# Altium PCB LED1710051012.PcbDoc
Units mm, origin at the board's own origin, x right, y up, seen from the top; angles counter-clockwise.
Board outline 152.4 x 101.6 mm, 2 copper layers (Top Layer, Bottom Layer); 15 components, 15 nets, 61 pads, 37 vias.
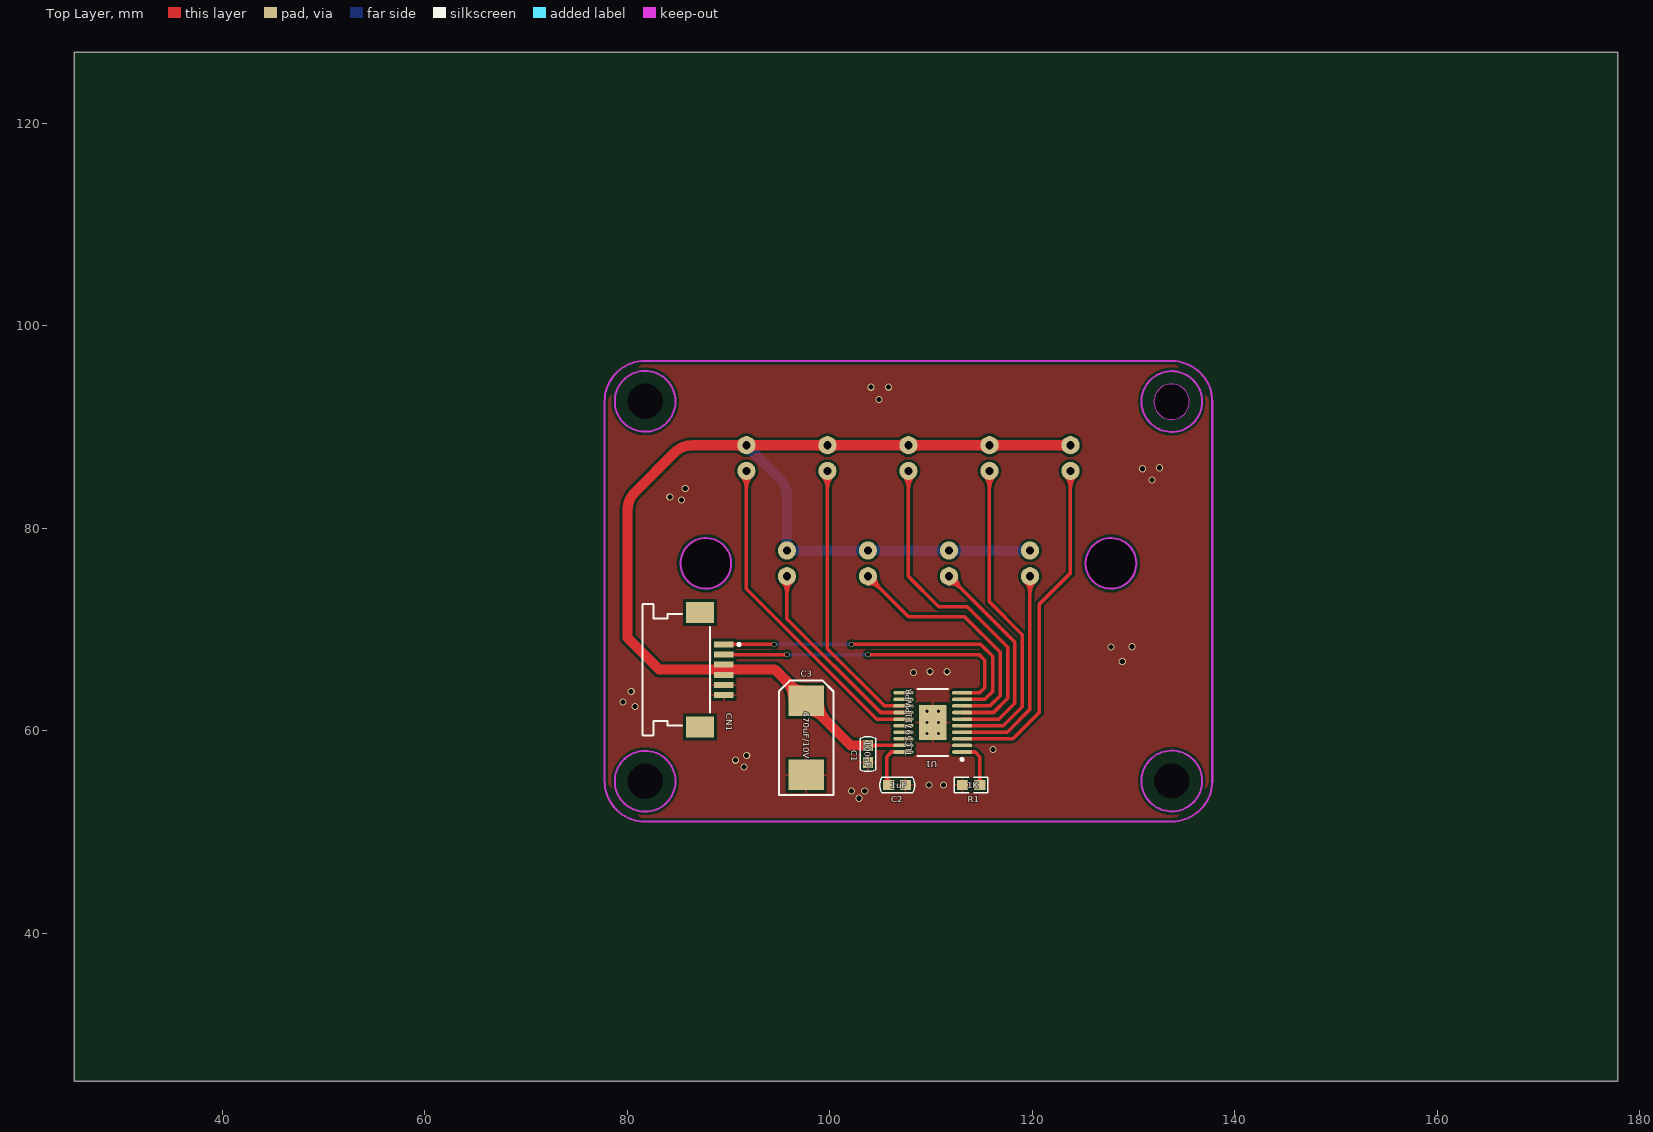
[diagram p0: Top Layer view]
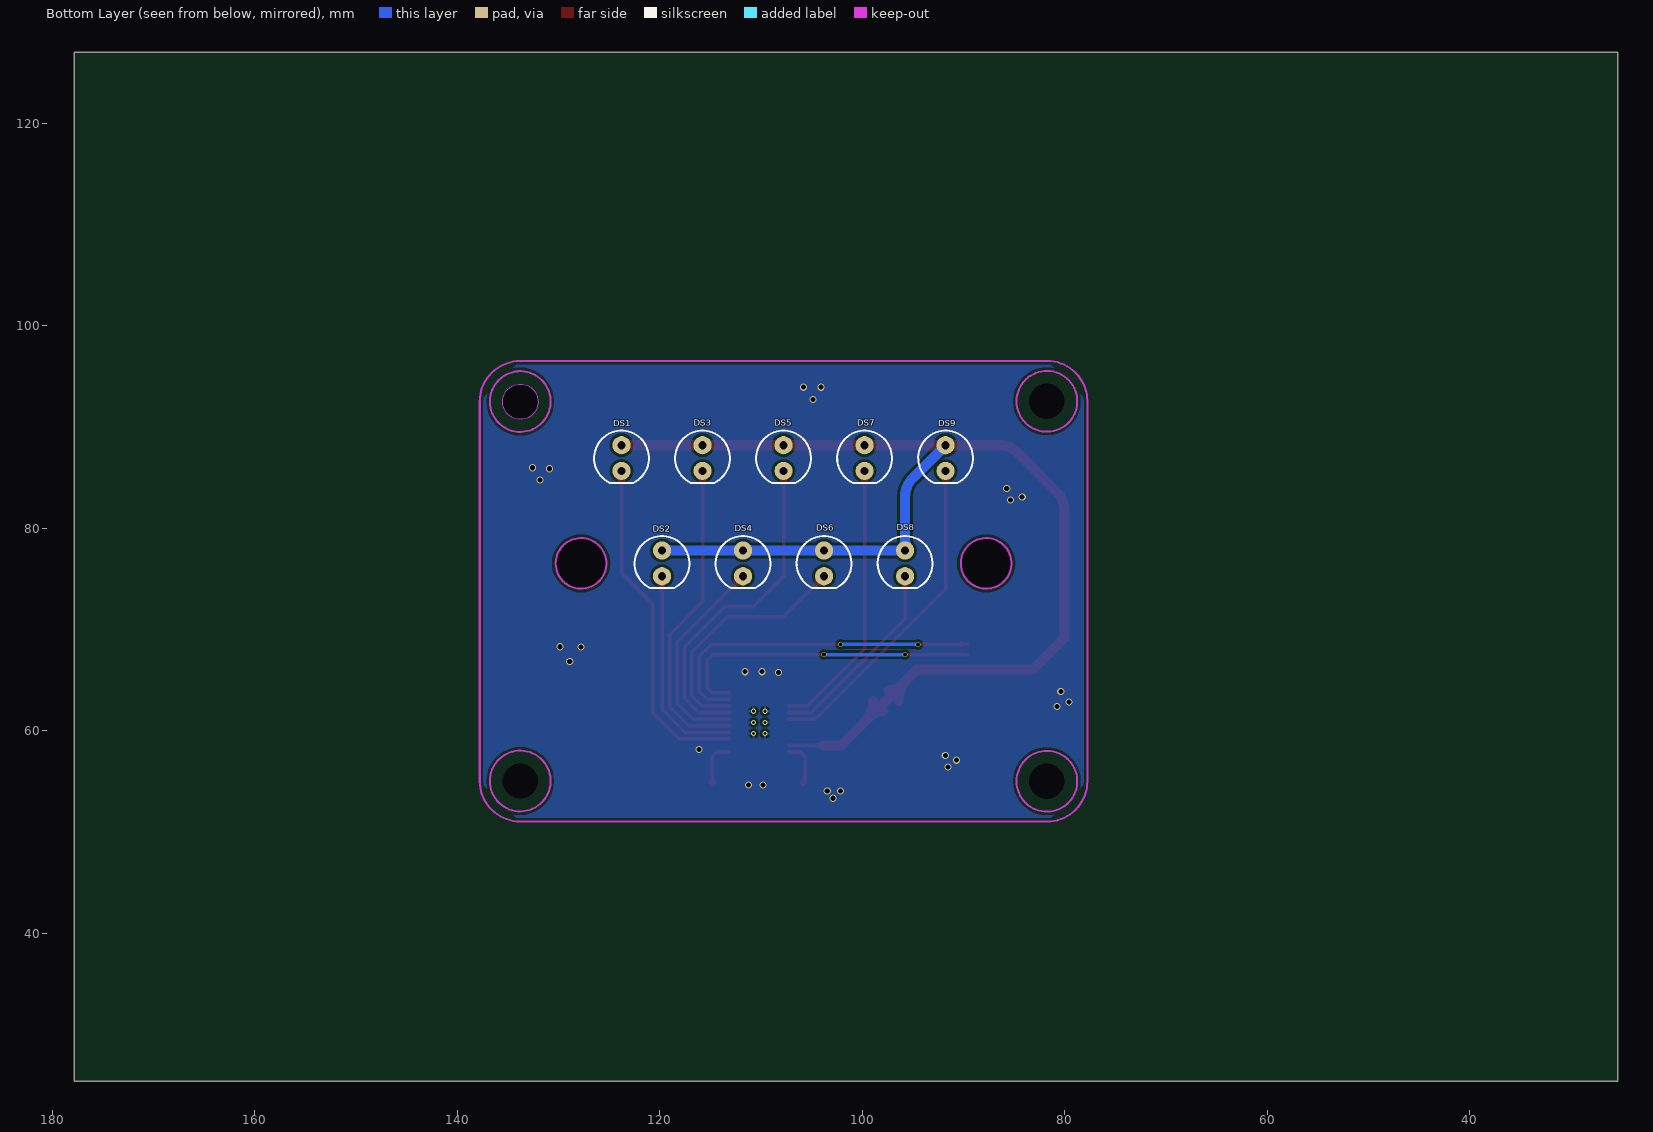
[diagram p1: Bottom Layer view, seen from below]

## Layer stack, top to bottom
Top Solder: solder mask 0.0102, Solder Resist, Dk 3.5
Top Layer: signal copper 0.0356
Dielectric1: dielectric 0.32, FR-4, Dk 4.8
Bottom Layer: signal copper 0.0356
Bottom Solder: solder mask 0.0102, Solder Resist, Dk 3.5

## Board outline
25.4,25.4 177.8,25.4 177.8,127 25.4,127

## Design rules (kind name [scope] priority, off if disabled: settings)
Clearance [All] p1: gap=0.254 ignorepadtopadclearanceinfootprint=FALSE except(0: Arc-Hole Track-Hole SMDPad-Hole THPad-Hole Via-Hole Fill-Hole Poly-Hole Region-Hole Text-Hole)
PolygonConnect [All] p1: connectstyle=Relief reliefconductorwidth=0.254 reliefentries=4 polygonreliefangle="90 Angle" airgapwidth=0.254
RoomDefinition LED1705180858 [InComponentClass('LED1705180858')] p1: confinementstyle=ConfineIn formatcopy=TRUE lockcomponents=FALSE outline 0,0 50.8,0 50.8,25.4 0,25.4
RoutingVias [All] p1: holewidth=0.711 width=1.27 viastyle="Through Hole" minholewidth=0.711 minwidth=1.27 maxholewidth=0.711 maxwidth=1.27
SilkToSolderMaskClearance SilkscreenOverComponentPads [IsPad] p1: minsilkscreentomaskgap=0.254 clearancetoexposedcopper=TRUE
SolderMaskExpansion [All] p1: expansion=0.102
Width [All] p1: maxlimit=1 minlimit=0.254 preferedwidth=0.254 minimp=50.000000 maximp=50.000000 favimp=50.000000
29 further rules are at their usual default settings.

## Components (designator, comment, footprint, x,y, rotation, side; value= is the part's Value field where it differs from the comment)
C1 "100nF" C0603-3 103.759,57.709 r270 top
C2 "1uF" C0603-3 106.655,54.635 r0 top
C3 "470uF/10V" CASE-D_7343 97.663,59.309 r90 top
CN1 "" FFC/SM1.0-2H6 88.365,66.033 r270 top
DS1 "" LED2-2.54-5C 123.765,86.933 r180 bottom
DS2 "" LED2-2.54-5C 119.765,76.533 r180 bottom
DS3 "" LED2-2.54-5C 115.765,86.933 r180 bottom
DS4 "" LED2-2.54-5C 111.765,76.533 r180 bottom
DS5 "" LED2-2.54-5C 107.765,86.933 r180 bottom
DS6 "" LED2-2.54-5C 103.765,76.533 r180 bottom
DS7 "" LED2-2.54-5C 99.765,86.933 r180 bottom
DS8 "" LED2-2.54-5C 95.765,76.533 r180 bottom
DS9 "" LED2-2.54-5C 91.765,86.933 r180 bottom
R1 "1K" R0603-3 113.919,54.635 r180 top
U1 "TLC59711PWPR" HTSSOP20 110.165,60.833 r90 top

## Footprints (in the part's own frame and the unit in brackets; to place one, negate y for a bottom-side part, rotate by r counter-clockwise, add the part's x,y. Pads: shape width x height; smd on the part's side, far side on the other; paste and mask are expansions set on the pad)
C0603-3 [mm]
  rect 1.1x1 smd: 1(-0.838,0) 2(0.838,0)
  silkscreen extent -1.71,-0.76 1.72,0.76
CASE-D_7343 [mm]
  rect 3x3.5 smd: 1(3.65,0) 2(-3.65,0)
  silkscreen extent -5.65,-2.7 5.65,2.7
FFC/SM1.0-2H6 [mm] "FPC Connector, 6-Leads, Right Angle, Pitch 1.0 mm, Mated Height 3.0 mm, SMT"
  rect 0.6x1.9 smd: 1(-2.5,1.175) 2(-1.5,1.175) 3(-0.5,1.175) 4(0.5,1.175) 5(1.5,1.175) 6(2.5,1.175)
  rect 2.1x2.8 smd: MP1(-5.65,-1.175) MP2(5.65,-1.175)
  silkscreen extent -6.5,-6.87 6.5,2.8, body extent -6.5,-6.87 6.5,1.83, height 3.01
HTSSOP20 [mm] "SOP, 20-Leads, Body 6.5x4.4mm, Pitch 0.65mm, Thermal Pad 2.965x2.29mm, IPC Low Density"
  oval 0.35x2 smd: 1(-2.925,-2.9) 2(-2.275,-2.9) 3(-1.625,-2.9) 4(-0.975,-2.9) 5(-0.325,-2.9) 6(0.325,-2.9) 7(0.975,-2.9) 8(1.625,-2.9) 9(2.275,-2.9) 10(2.925,-2.9) 11(2.925,2.9) 12(2.275,2.9) 13(1.625,2.9) 14(0.975,2.9) 15(0.325,2.9) 16(-0.325,2.9) 17(-0.975,2.9) 18(-1.625,2.9) 19(-2.275,2.9) 20(-2.925,2.9)
  rect 3.43x2.75 smd: 21(0,0)
  silkscreen extent -3.77,-3.03 3.3,1.5, body extent -3.3,-2.25 3.3,2.25, height 1.2
LED2-2.54-5C [mm]
  round 1.8 hole 0.8: 1(0,1.27) 2(0,-1.27)
  silkscreen extent -2.7,-2.44 2.7,2.7
R0603-3 [mm]
  rect 1.1x1 smd: 1(-0.889,0) 2(0.811,0)
  silkscreen extent -1.69,-0.76 1.61,0.76, body extent -1.18,-0.38 1.1,0.38, height 1

## Part data
C1 C2: library part Cap, "Capacitor"
C3: library part "Cap Pol1", "Polarized Capacitor (Radial)"
CN1: library part "Header 6", "Header, 6-Pin"
DS1 DS2 DS3 DS4 DS5 DS6 DS7 DS8 DS9: library part LED0, "Typical INFRARED GaAs LED"
R1: library part Res3, "Resistor"
U1: library part TLC59711, "12-Channel,16-Bit,LED Driver with 3.3-V Linear Ragulator"

## Free pads (board coordinates)
  round 1.524 hole 3.5: 0(81.765,55.021) 0(81.765,92.533) 0(133.765,55.045) 0(133.765,92.513)
  round 0 hole 5: 0(87.765,76.533) 0(127.765,76.533)

## Via types
v1: diameter 0.7, hole 0.5, Top Layer to Bottom Layer, 27 vias
v2: diameter 0.5, hole 0.3, Top Layer to Bottom Layer, 6 vias
v3: diameter 0.5, hole 0.38, Top Layer to Bottom Layer, 4 vias

## Nets (pads, with @x,y where several pads share a name; then routed paths per layer and width w, separated by ;. In a path a pad name is that pad's centre, name@x,y a point inside that pad or via, vN(x,y) a via of type N, cw(c..) or ccw(c..) an arc to the next point about the centre after c; other vN are vias at no path point)
+5V: C1.1 C3.1 CN1.3 CN1.4 DS1.1 DS2.1 DS3.1 DS4.1 DS5.1 DS6.1 DS7.1 DS8.1 DS9.1 U1.19 | length 161.6
  Top Layer w0.35: C1.1 103.77,58.558 U1.19 ; C1.1@103.989,58.317 cw(c104.57,57.736) 104.57,58.558 ; C1.1@103.989,58.777 ccw(c104.517,59.305) 104.517,58.558
  Top Layer w1: DS9.1@91.482,87.92 ccw(c90.799,87.237) 90.799,88.203 ccw(c90.799,89.169) DS9.1@91.482,88.486 ; DS9.1@92.048,87.92 cw(c92.731,87.237) 92.731,88.203 cw(c92.731,89.169) DS9.1@92.048,88.486 ; 95.529,65.093 cw(c93.395,62.959) C3.1@96.413,62.959 ; 96.133,64.489 ccw(c97.413,65.77) C3.1@97.413,63.959 ; C3.1@97.913,61.959 cw(c97.913,60.148) 99.193,61.429 ; C3.1@98.913,62.959 ccw(c101.931,62.959) 99.797,60.825 ; DS7.1@99.482,87.92 ccw(c98.799,87.237) 98.799,88.203 ccw(c98.799,89.169) DS7.1@99.482,88.486 ; DS7.1@100.048,87.92 cw(c100.731,87.237) 100.731,88.203 cw(c100.731,89.169) DS7.1@100.048,88.486 ; C1.1@103.77,58.558 102.064,58.558 C3.1 94.557,66.065 83.134,66.065 80.035,69.164 80.035,81.792 cw(c82.575,81.792) 80.779,83.588 84.65,87.459 cw(c86.446,85.663) 86.446,88.203 DS9.1 DS7.1 DS5.1 DS3.1 DS1.1 ; DS5.1@107.482,87.92 ccw(c106.799,87.237) 106.799,88.203 ccw(c106.799,89.169) DS5.1@107.482,88.486 ; DS5.1@108.048,87.92 cw(c108.731,87.237) 108.731,88.203 cw(c108.731,89.169) DS5.1@108.048,88.486 ; DS3.1@115.482,87.92 ccw(c114.799,87.237) 114.799,88.203 ccw(c114.799,89.169) DS3.1@115.482,88.486 ; DS3.1@116.048,87.92 cw(c116.731,87.237) 116.731,88.203 cw(c116.731,89.169) DS3.1@116.048,88.486 ; DS1.1@123.482,87.92 ccw(c122.799,87.237) 122.799,88.203 ccw(c122.799,89.169) DS1.1@123.482,88.486
  Bottom Layer w1: DS9.1@91.765,87.803 cw(c91.765,86.837) 92.448,87.52 cw(c93.131,88.203) DS9.1@92.165,88.203 ; DS9.1 95.021,84.947 cw(c93.225,83.151) 95.765,83.151 DS8.1 DS6.1 DS4.1 DS2.1 ; DS8.1@95.482,78.086 ccw(c94.799,78.769) 95.765,78.769 ccw(c96.731,78.769) 96.048,78.086 ccw(c96.731,78.769) 96.731,77.803 ccw(c96.731,76.837) DS8.1@96.048,77.52 ; DS6.1@103.482,77.52 ccw(c102.799,76.837) 102.799,77.803 ccw(c102.799,78.769) DS6.1@103.482,78.086 ; DS6.1@104.048,77.52 cw(c104.731,76.837) 104.731,77.803 cw(c104.731,78.769) DS6.1@104.048,78.086 ; DS4.1@111.482,77.52 ccw(c110.799,76.837) 110.799,77.803 ccw(c110.799,78.769) DS4.1@111.482,78.086 ; DS4.1@112.048,77.52 cw(c112.731,76.837) 112.731,77.803 cw(c112.731,78.769) DS4.1@112.048,78.086 ; DS2.1@119.482,77.52 ccw(c118.799,76.837) 118.799,77.803 ccw(c118.799,78.769) DS2.1@119.482,78.086
GND: C1.2 C2.2 C3.2 CN1.5 CN1.6 R1.2 U1.2 U1.21
  other v1: 102.895,53.34 102.159,54.051 103.454,54.077 109.804,54.635 111.227,54.661 91.542,56.413 90.678,57.099 91.796,57.582 116.103,58.141 80.747,62.408 79.578,62.84 80.391,63.881 108.28,65.761 109.906,65.837 111.557,65.837 128.88,66.853 127.762,68.275 129.845,68.301 85.369,82.779 84.201,83.109 85.725,83.947 131.826,84.785 130.886,85.877 132.563,85.979 104.877,92.71 104.064,93.929 105.791,93.929
  other v2: 109.615,59.733 110.715,59.733 109.615,60.833 110.715,60.833 109.615,61.933 110.715,61.933
NetC2_1: C2.1 U1.20 | length 6.5
  Top Layer w0.35: 105.613,55.79 ccw(c106.921,55.79) C2.1@105.996,54.865 ; 105.846,57.662 cw(c106.44,57.067) U1.20@106.44,57.908 ; C2.1@105.918,54.635 105.613,54.94 105.613,57.429 106.092,57.908 U1.20
NetCN1_1: CN1.1 U1.9 | length 34.3
  Top Layer w0.35: CN1.1 94.484,68.533 v3(94.488,68.529) ; CN1.1@90.278,68.445 cw(c90.492,68.231) 90.492,68.533 cw(c90.492,68.835) CN1.1@90.278,68.621 ; v3(102.133,68.529) 114.91,68.529 116.078,67.361 116.078,63.881 115.305,63.108 U1.9
  Bottom Layer w0.35: v3(94.488,68.529) v3(102.133,68.529)
NetCN1_2: CN1.2 U1.10 | length 31.6
  Top Layer w0.35: CN1.2 v3(95.778,67.533) ; CN1.2@90.278,67.445 cw(c90.492,67.231) 90.492,67.533 cw(c90.492,67.835) CN1.2@90.278,67.621 ; v3(103.779,67.533) 114.737,67.533 115.291,66.98 115.291,64.262 114.787,63.758 U1.10
  Bottom Layer w0.35: v3(95.778,67.533) v3(103.779,67.533)
NetDS1_2: DS1.2 U1.3 | length 38
  Top Layer w0.35: U1.3 118.085,59.208 120.701,61.824 120.701,72.517 123.765,75.581 DS1.2 ; DS1.2@123.252,85.15 cw(c122.015,83.913) 123.765,83.913 cw(c125.515,83.913) DS1.2@124.278,85.15 ; DS1.2@123.5,85.398 cw(c122.86,84.758) 123.765,84.758 cw(c124.67,84.758) DS1.2@124.03,85.398
NetDS2_2: DS2.2 U1.4 | length 24.3
  Top Layer w0.35: U1.4 117.516,59.858 119.761,62.103 119.761,75.259 DS2.2 ; DS2.2@119.252,74.75 cw(c118.024,73.522) 119.761,73.522 ; 119.761,73.503 cw(c121.525,73.503) DS2.2@120.278,74.75 ; 119.761,74.348 cw(c120.68,74.348) DS2.2@120.03,74.998
NetDS3_2: DS3.2 U1.5 | length 35.5
  Top Layer w0.35: U1.5 117.125,60.508 118.999,62.382 118.999,69.494 115.765,72.728 DS3.2 ; DS3.2@115.252,85.15 cw(c114.015,83.913) 115.765,83.913 cw(c117.515,83.913) DS3.2@116.278,85.15 ; DS3.2@115.5,85.398 cw(c114.86,84.758) 115.765,84.758 cw(c116.67,84.758) DS3.2@116.03,85.398
NetDS4_2: DS4.2 U1.6 | length 25.2
  Top Layer w0.35: DS4.2@111.765,74.538 cw(c111.765,72.788) 113.003,74.025 cw(c114.24,75.263) DS4.2@112.49,75.263 ; DS4.2@111.765,74.888 cw(c111.765,73.983) 112.405,74.623 cw(c113.045,75.263) DS4.2@112.14,75.263 ; DS4.2 118.262,68.766 118.262,62.738 116.682,61.158 U1.6
NetDS5_2: DS5.2 U1.7 | length 37.4
  Top Layer w0.35: DS5.2@107.252,85.15 cw(c106.015,83.913) 107.765,83.913 cw(c109.515,83.913) DS5.2@108.278,85.15 ; DS5.2@107.5,85.398 cw(c106.86,84.758) 107.765,84.758 cw(c108.67,84.758) DS5.2@108.03,85.398 ; DS5.2 107.765,75.242 110.744,72.263 113.563,72.263 117.577,68.25 117.577,63.221 116.164,61.808 U1.7
NetDS6_2: DS6.2 U1.8 | length 28.8
  Top Layer w0.35: DS6.2@103.765,74.538 cw(c103.765,72.788) 105.003,74.025 cw(c106.24,75.263) DS6.2@104.49,75.263 ; DS6.2@103.765,74.888 cw(c103.765,73.983) 104.405,74.623 cw(c105.045,75.263) DS6.2@104.14,75.263 ; DS6.2 107.781,71.247 113.335,71.247 116.815,67.767 116.815,63.475 115.798,62.458 U1.8
NetDS7_2: DS7.2 U1.13 | length 31.6
  Top Layer w0.35: DS7.2@99.252,85.15 cw(c98.015,83.913) 99.765,83.913 cw(c101.515,83.913) DS7.2@100.278,85.15 ; DS7.2@99.5,85.398 cw(c98.86,84.758) 99.765,84.758 cw(c100.67,84.758) DS7.2@100.03,85.398 ; DS7.2 99.765,68.104 105.411,62.458 U1.13
NetDS8_2: DS8.2 U1.14 | length 23.7
  Top Layer w0.35: DS8.2@95.252,74.75 cw(c94.015,73.513) 95.765,73.513 cw(c97.515,73.513) DS8.2@96.278,74.75 ; DS8.2@95.5,74.998 cw(c94.86,74.358) 95.765,74.358 cw(c96.67,74.358) DS8.2@96.03,74.998 ; DS8.2 95.765,71.062 105.019,61.808 U1.14
NetDS9_2: DS9.2 U1.15 | length 36.6
  Top Layer w0.35: DS9.2@91.252,85.15 cw(c90.015,83.913) 91.765,83.913 cw(c93.515,83.913) DS9.2@92.278,85.15 ; DS9.2@91.5,85.398 cw(c90.86,84.758) 91.765,84.758 cw(c92.67,84.758) DS9.2@92.03,85.398 ; DS9.2 91.765,74.046 104.653,61.158 U1.15
NetR1_1: R1.1 U1.1 | length 6
  Top Layer w0.35: U1.1 114.355,57.908 114.808,57.455 R1.1 ; R1.1@114.578,54.865 ccw(c114.023,55.42) 114.808,55.42 ccw(c115.593,55.42) R1.1@115.038,54.865
pads on no net: CN1.MP1 CN1.MP2 U1.11 U1.12 U1.16 U1.17 U1.18

## Polygon pours and split planes (outlines as drawn)
GND on Top Layer "Bottom Layer-No Net" (solid, remove dead copper, pour order 4): 77.765,92.513 81.764,96.512 86.131,96.512 133.764,96.512 137.764,92.512 137.764,55.025 137.764,55.012 133.764,51.012 81.764,51.012 77.764,55.012 77.765,55.013 77.765,92.513
GND on Bottom Layer "Bottom Layer-No Net" (solid, remove dead copper, pour order 3): 77.766,92.534 81.765,96.533 86.131,96.533 133.765,96.533 137.765,92.533 137.765,55.045 137.765,55.033 133.765,51.033 81.765,51.033 77.765,55.033 77.766,55.034 77.766,92.534

## Keep-outs
Keep-Out Layer:
  circle w0.1: c133.753,92.493 r1.75
  circle w0.2: c87.765,76.533 r2.5
  circle w0.2: c127.765,76.533 r2.5
  circle w0.2: c81.765,92.533 r3
  circle w0.2: c133.765,92.513 r3
  circle w0.2: c133.765,55.045 r3
  circle w0.2: c81.765,55.021 r3
  lines w0.2: 77.765,92.513 77.765,55.033 ccw(c81.765,55.033) 81.765,51.033 133.765,51.033 ; 77.766,92.534 cw(c81.765,92.534) 81.765,96.533 133.765,96.533 ; 133.765,51.045 ccw(c133.765,55.045) 137.765,55.045 137.765,92.533 ; 133.765,96.513 cw(c133.765,92.513) 137.765,92.513

## Silkscreen, mask and mechanical layers (free items; w line width, h text height)
Mechanical 1:
  lines w0.2: 83.365,86.933 134.865,86.933 ; 85.565,76.533 131.365,76.533 ; 87.765,74.933 87.765,88.933 ; 91.765,74.533 91.765,89.833 ; 95.765,74.933 95.765,88.933 ; 99.765,74.533 99.765,89.833 ; 103.765,74.933 103.765,88.933 ; 107.765,74.533 107.765,89.833 ; 111.765,74.933 111.765,88.933 ; 115.765,74.533 115.765,89.833 ; 119.765,74.933 119.765,88.933 ; 123.765,74.533 123.765,89.833 ; 127.765,74.633 127.765,89.933
  lines w0.3: 84.39,66.033 88.365,66.033

## Dimensions
88.365,66.033 to 87.765,76.533 on Mechanical 1
77.765,92.513 to 137.765,92.533 on Mechanical 1
81.765,51.033 to 81.765,96.533 on Mechanical 1
81.765,92.533 to 133.765,92.513 on Mechanical 1
132.515,93.73 to 0,0 on Mechanical 1
127.765,76.533 to 133.765,92.513 on Mechanical 1